# Altium PCB PCB_mounting.PcbDoc (part 1 of 4)
Units mm, origin at the board's own origin, x right, y up, seen from the top; angles counter-clockwise.
Board outline 75 x 100 mm, 4 copper layers (Top Layer, Int1 (GND), Int2 (PWR), Bottom Layer), stack 1.586 mm thick; 145 components, 97 nets, 660 pads, 380 vias.
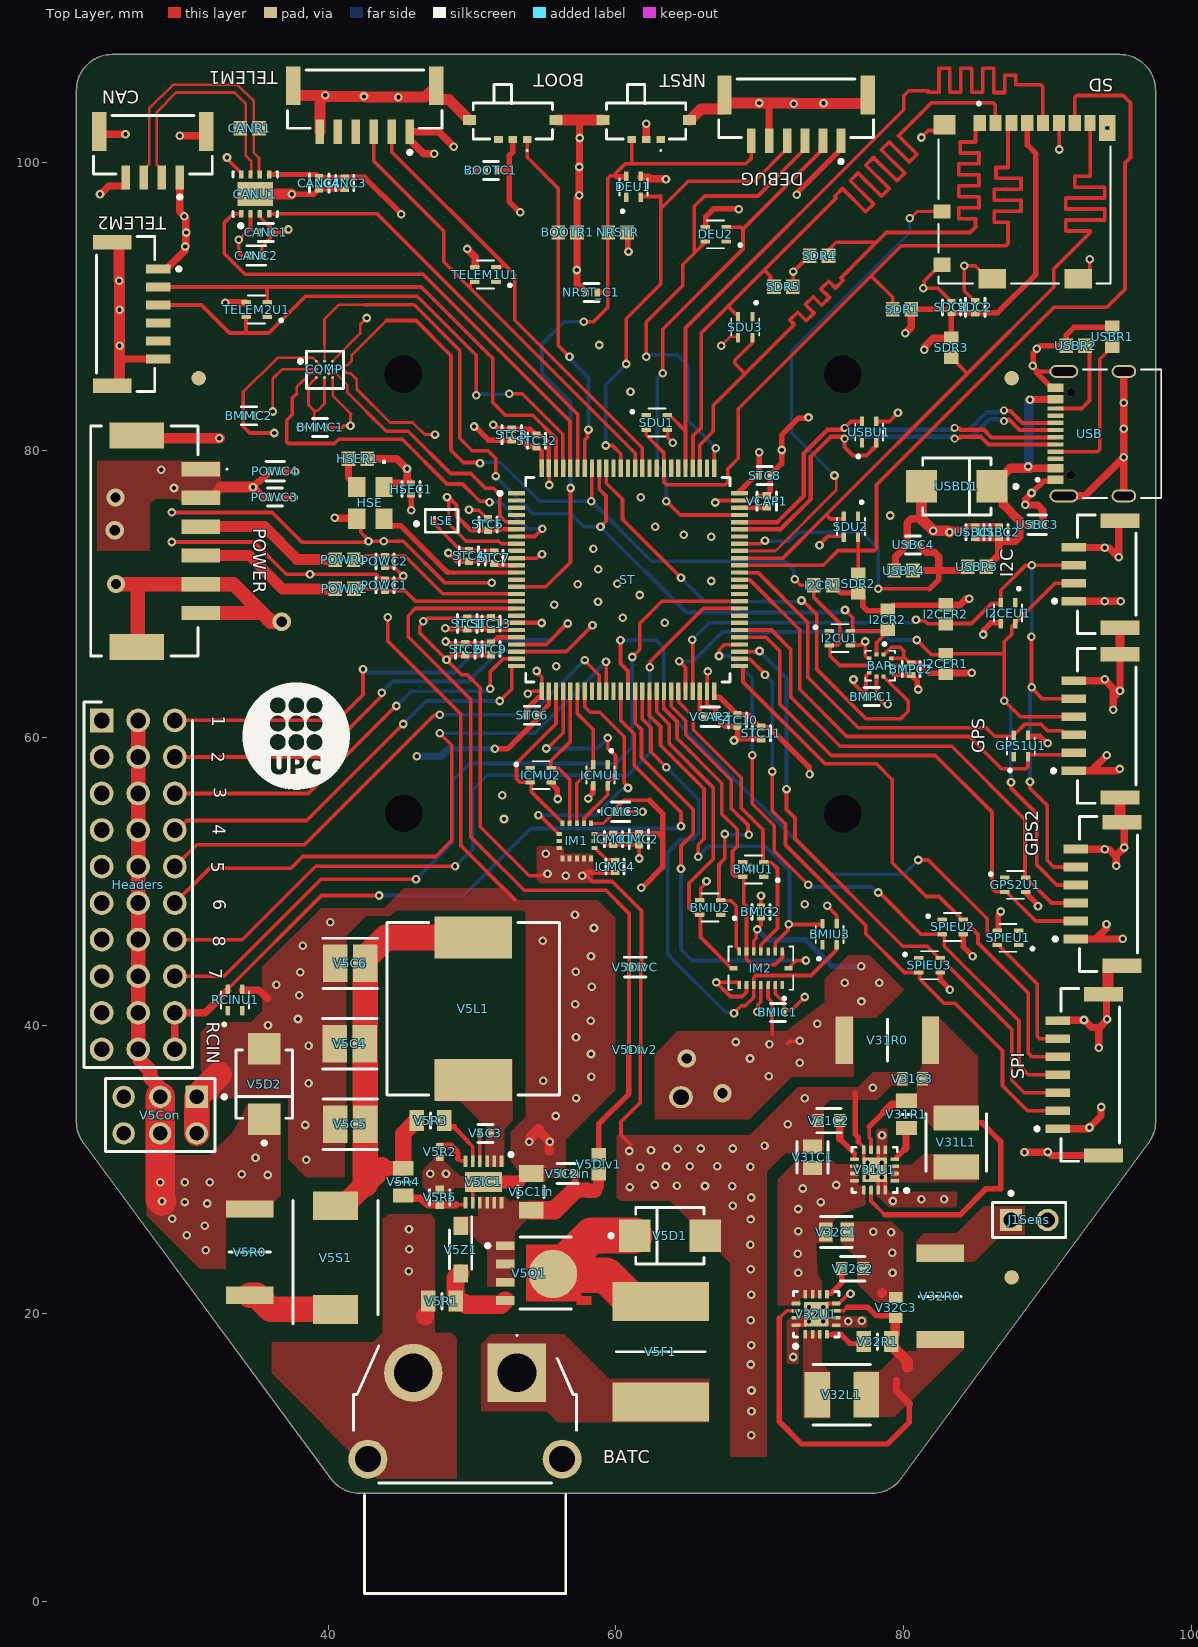
[diagram p0: Top Layer view]
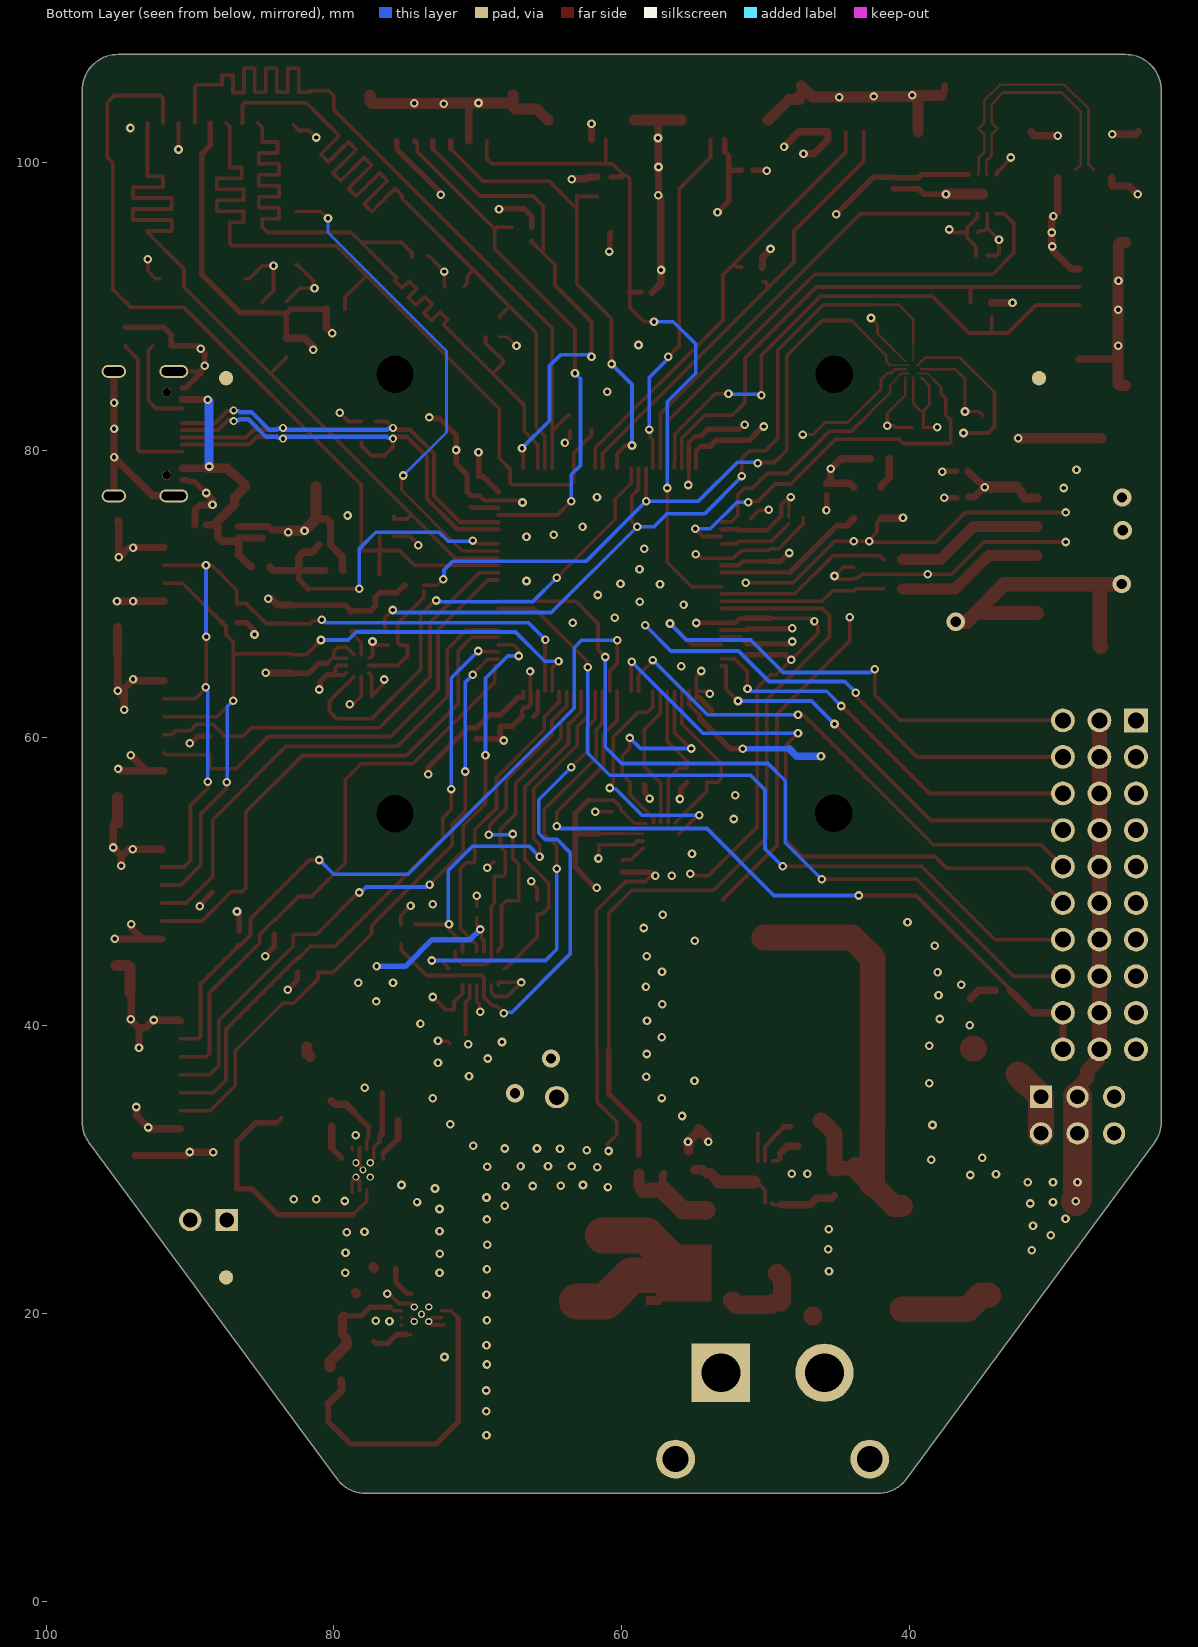
[diagram p1: Bottom Layer view, seen from below]
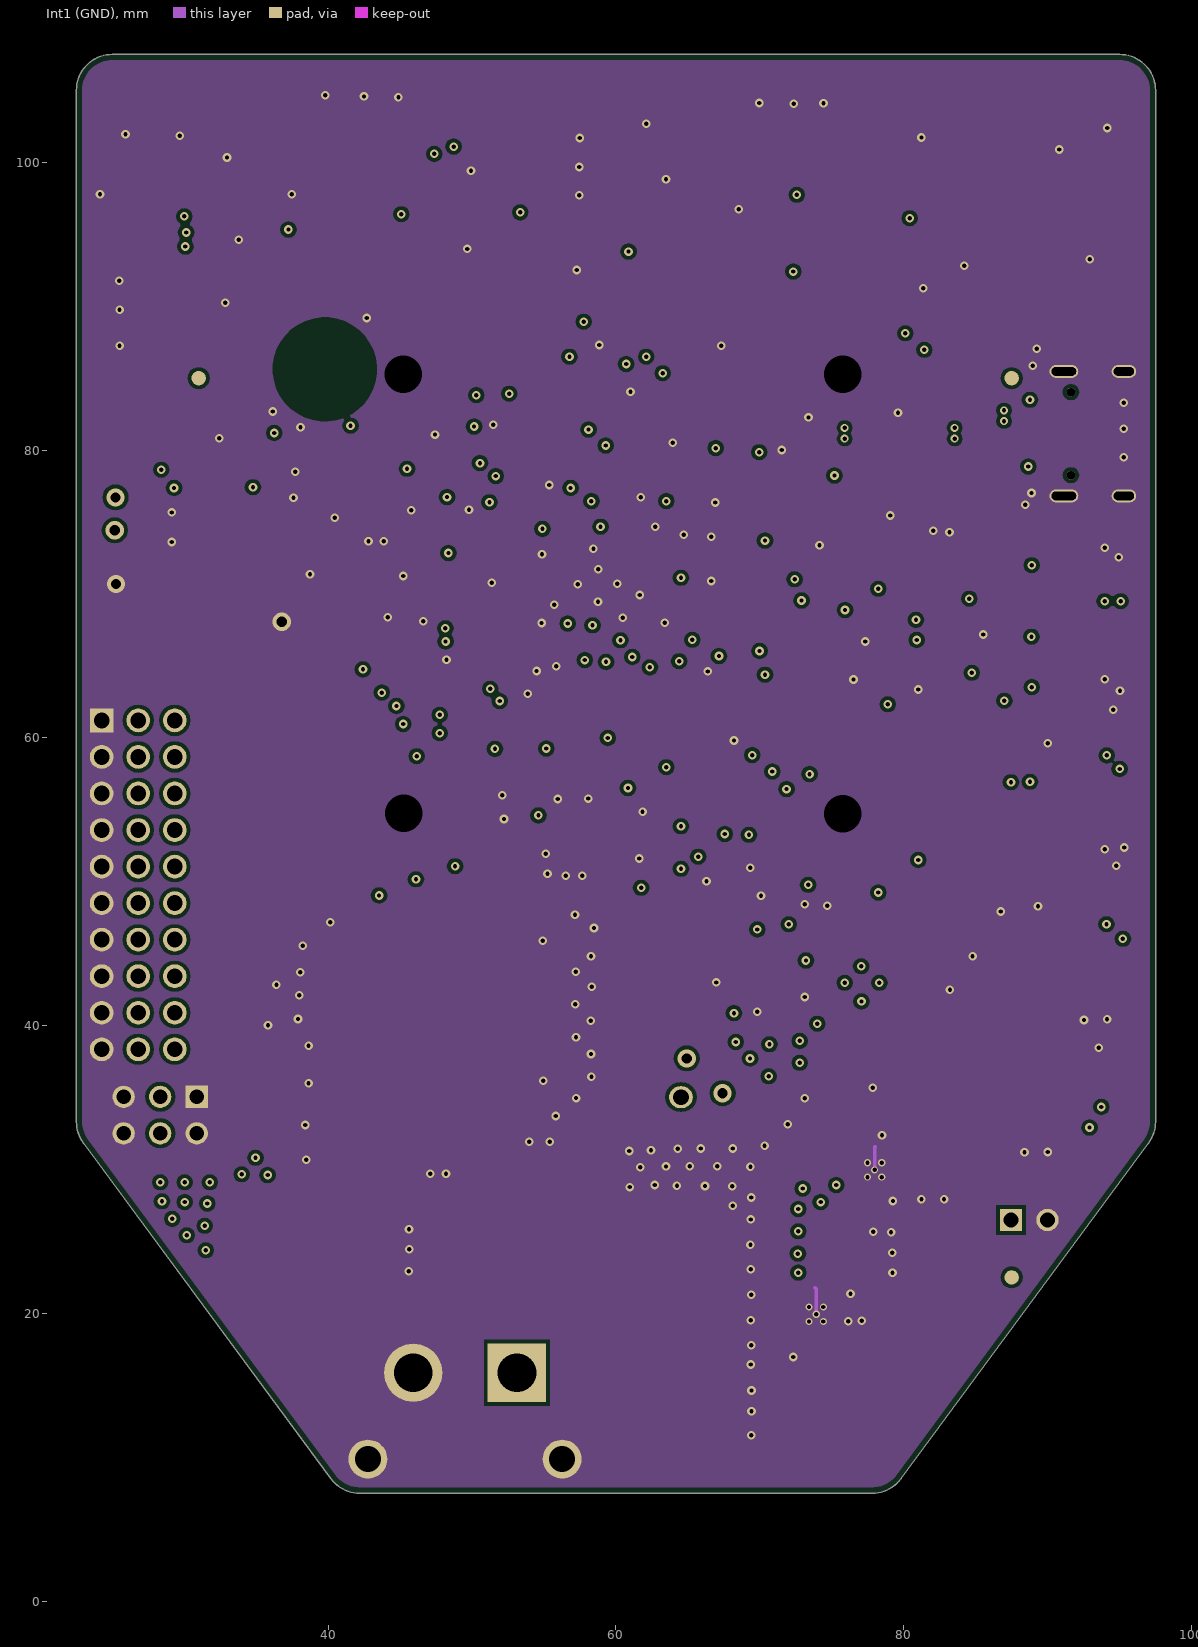
[diagram p2: Int1 (GND)]
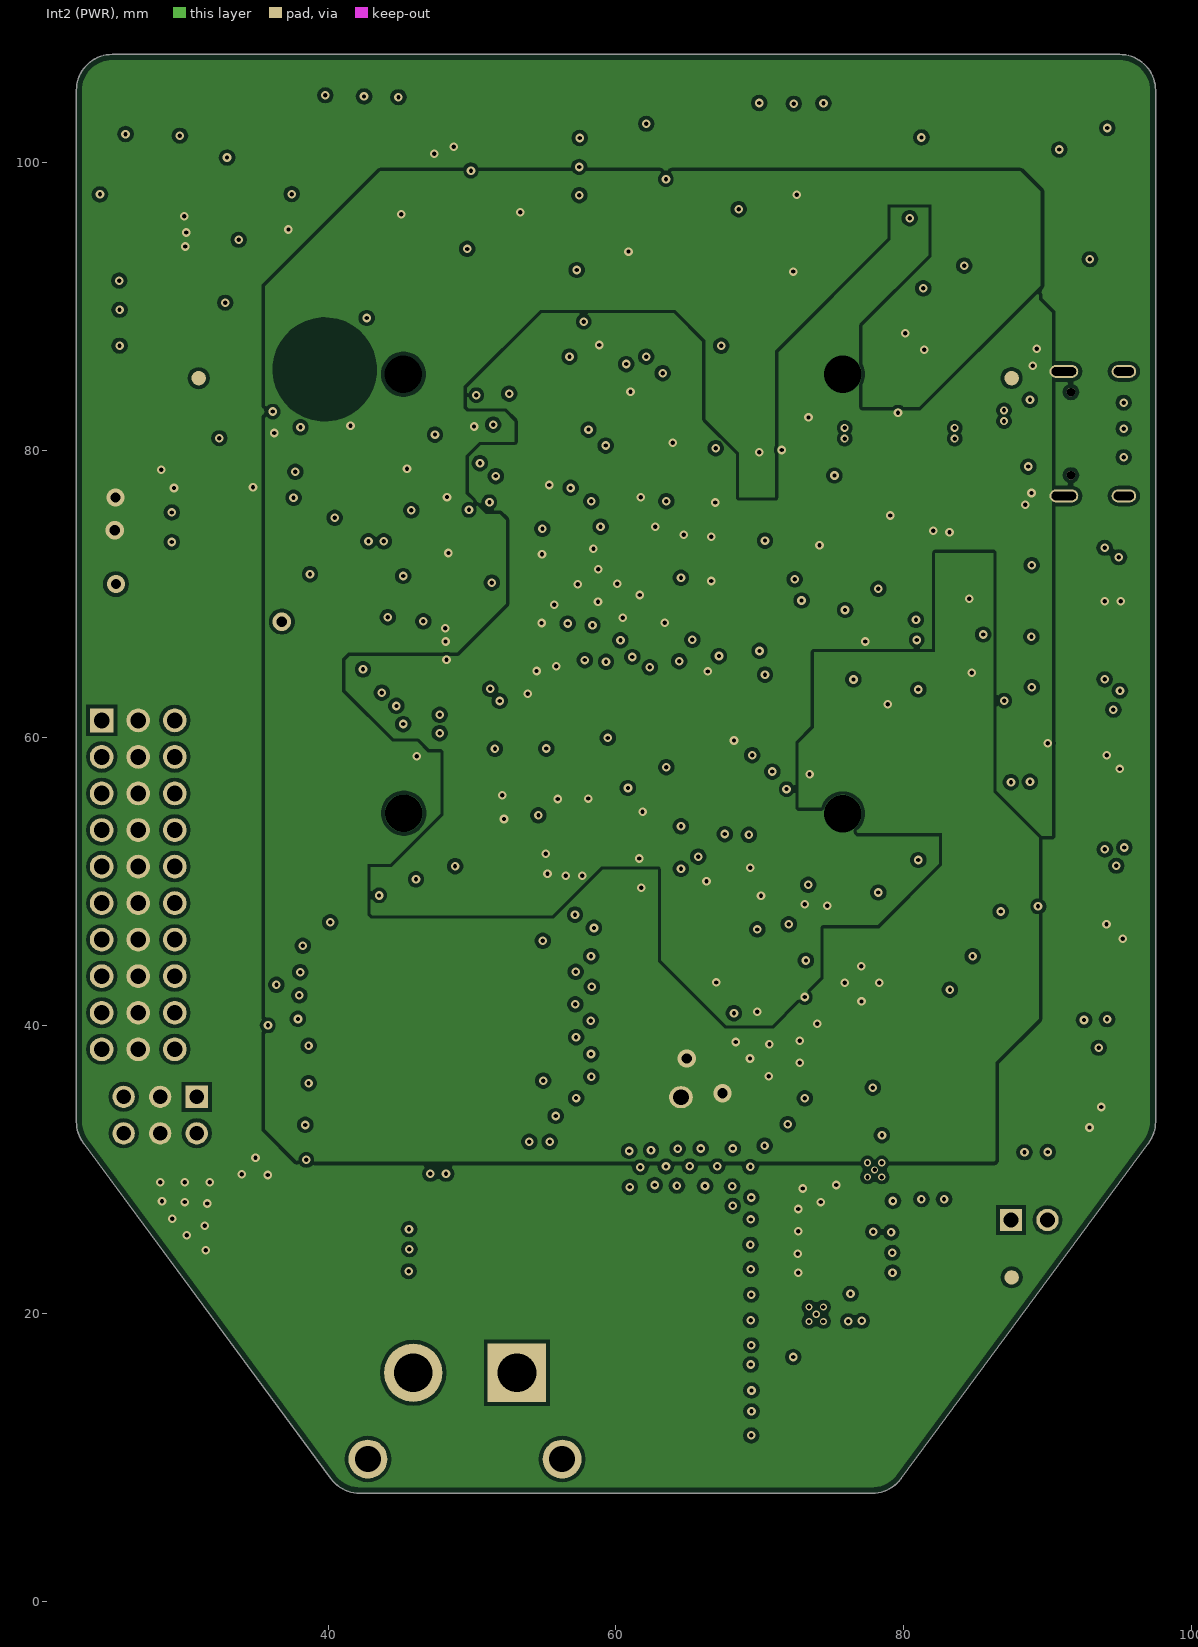
[diagram p3: Int2 (PWR)]
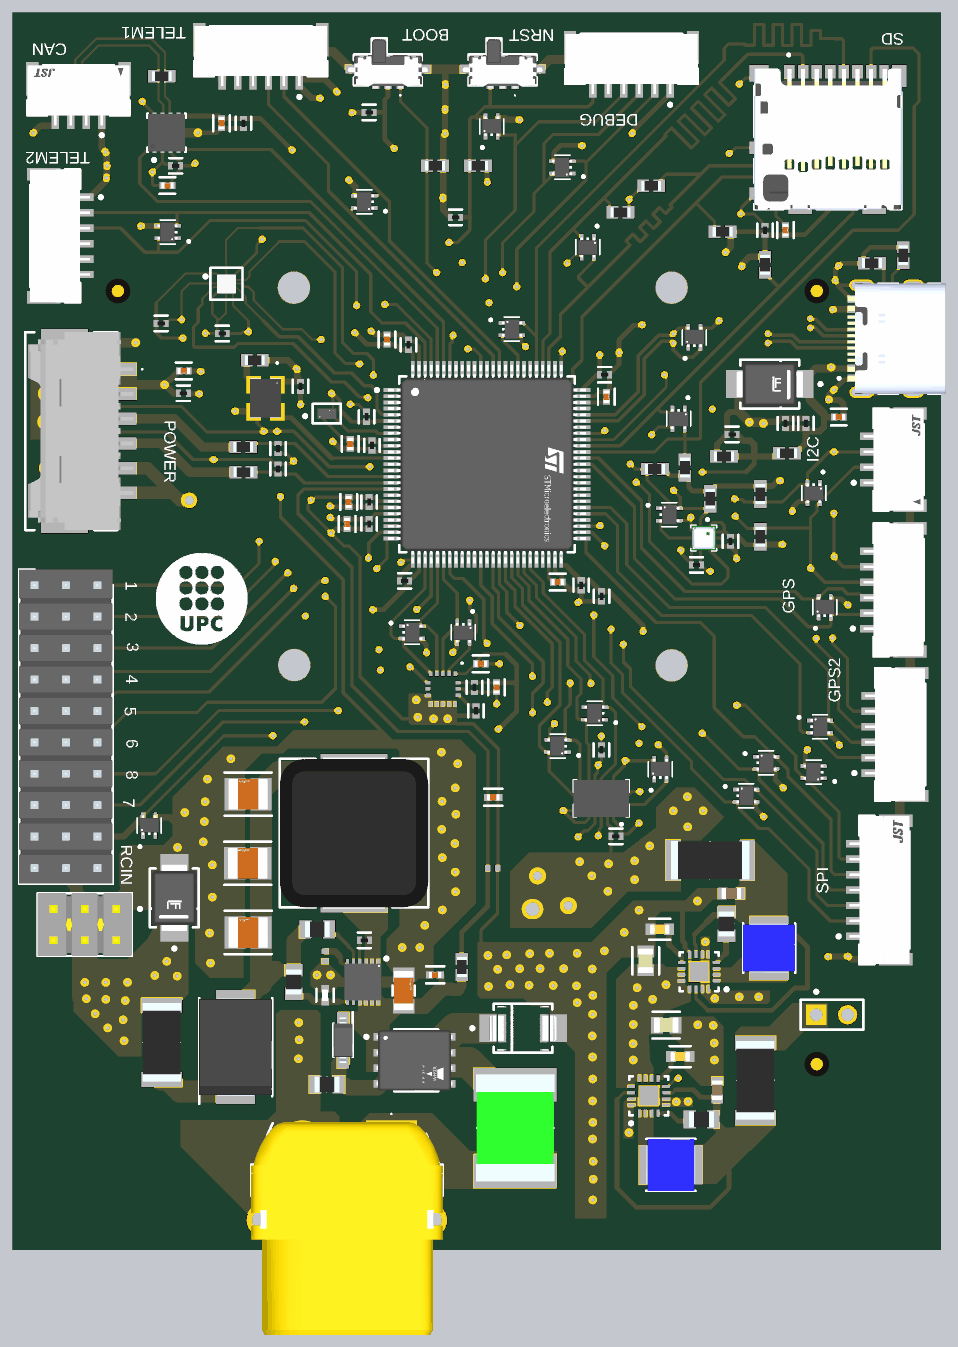
[diagram p6: 3D render of the assembled board from above, using the file's embedded part models]

## Layer stack, top to bottom
Top Solder: solder mask 0.0254, SM-001, Dk 4
Top Layer: signal copper 0.035
Dielectric 2: prepreg 0.2104, 7628, Dk 4.4
Int1 (GND): signal copper 0.0152
Dielectric 3: core 1.065, FR4, Dk 4.6
Int2 (PWR): signal copper 0.0152
Dielectric 4: prepreg 0.2104, 7628, Dk 4.4
Bottom Layer: signal copper 0.035
Bottom Solder: solder mask 0.0254, SM-001, Dk 4

## Board outline
22.988,31.838 cw(c25,33.322) 22.5,33.322 22.5,105 cw(c25,105) 25,107.5 95,107.5 cw(c95,105) 97.5,105 97.5,33.322 cw(c95,33.322) 97.012,31.838 79.812,8.516 cw(c77.8,10) 77.8,7.5 42.2,7.5 cw(c42.2,10) 40.188,8.516

## Design rules (kind name [scope] priority, off if disabled: settings)
BoardOutlineClearance [All] p1: gap=0.4 ignorepadtopadclearanceinfootprint=FALSE
Clearance [All] p1: gap=0.254 ignorepadtopadclearanceinfootprint=TRUE except(0.102: Arc-Arc Arc-Track Arc-SMDPad Track-Track Track-SMDPad; 0.15: SMDPad-SMDPad SMDPad-THPad SMDPad-Via SMDPad-Hole THPad-THPad THPad-Via THPad-Hole; 0.152: Arc-Via Track-Via; 0.2: Via-Via; 0.28: Arc-THPad Track-THPad)
ComponentClearance [All] p1: gap=0.4 collisioncheckmode=3 verticalgap=0.254 showdistances=FALSE
DiffPairsRouting DiffPairsRouting_1 [InDifferentialPair('CAN')] p1: maxlimit=0.483 minlimit=0.203 mostfreqgap=0.483 toplayer_mingap=0.356 toplayer_maxgap=0.356 toplayer_prefgap=0.356 toplayer_minwidth=0.182 toplayer_maxwidth=0.182 toplayer_prefwidth=0.182 bottomlayer_mingap=0.356 bottomlayer_maxgap=0.356 bottomlayer_prefgap=0.356 bottomlayer_minwidth=0.182 bottomlayer_maxwidth=0.182 bottomlayer_prefwidth=0.182 impedanceprofiledriven=TRUE impedanceprofileid={2F0167D7-8F8B-47BC-B081-F93A2940DF9A} impedanceprofilevalue=120.000000 maxuncoupledlength=12.7
DiffPairsRouting [InDifferentialPair('USB_OTG_FS')] p2: maxlimit=0.254 minlimit=0.203 mostfreqgap=0.254 toplayer_maxgap=0.203 toplayer_prefgap=0.203 toplayer_minwidth=0.286 toplayer_maxwidth=0.286 toplayer_prefwidth=0.286 bottomlayer_maxgap=0.203 bottomlayer_prefgap=0.203 bottomlayer_minwidth=0.286 bottomlayer_maxwidth=0.286 bottomlayer_prefwidth=0.286 impedanceprofiledriven=TRUE impedanceprofileid={D853BFCF-9175-4109-AF81-765B84E8F480} impedanceprofilevalue=90.000000 maxuncoupledlength=12.7
HoleSize [All] p1: absolutevalues=TRUE maxlimit=6.3 minlimit=0.2 maxpercent=80.000 minpercent=20.000
MatchedLengths "Schematic Matched Net Lengths" [InNetClass('SDMMC')] p1: tolerance=1.5 checknetsindiffpair=FALSE checkdiffpairvsdiffpair=TRUE checkxsignals=TRUE checkothers=TRUE
MinimumSolderMaskSliver [All] p1: minsoldermaskwidth=0.1
PolygonConnect [All] p1: connectstyle=Direct reliefconductorwidth=0.254 reliefentries=4 polygonreliefangle="90 Angle" airgapwidth=0.254
RoutingVias [All] p1: holewidth=0.3 width=0.6 viastyle="Through Hole" minholewidth=0.2 minwidth=0.45 maxholewidth=0.711 maxwidth=1.27
SilkToSolderMaskClearance [IsPad] p1: minsilkscreentomaskgap=0.15 clearancetoexposedcopper=TRUE
SolderMaskExpansion [All] p1: expansion=0.05 istentingtop=FALSE
SupplyNets "Schematic Supply Nets_4" [InNet('+5')] p1: voltage=0.000
SupplyNets "Schematic Supply Nets_3" [InNet('GND')] p2: voltage=0.000
SupplyNets "Schematic Supply Nets_2" [InNet('+3V3 Sens')] p3: voltage=0.000
SupplyNets "Schematic Supply Nets_1" [InNet('BAT (6-36)V')] p4: voltage=0.000
SupplyNets "Schematic Supply Nets" [InNet('+3V3 Core')] p5: voltage=0.000
UnRoutedNet [All] p1: checkbadconnections=TRUE
Width Width_1 [InNetClass('BMM')] p1: maxlimit=0.762 minlimit=0.102 preferedwidth=0.2
Width [All] p2: maxlimit=2.5 minlimit=0.102 preferedwidth=0.254
24 further rules are at their usual default settings.

## Classes and differential pairs
net class DIFF120: CAN_N CAN_P
net class DIFF90: USB_OTG_FS_N USB_OTG_FS_P
net class SDMMC: SDMMC_CK SDMMC_CMD SDMMC_D0 SDMMC_D1 SDMMC_D2 SDMMC_D3
differential pair USB_OTG_FS: +USB_OTG_FS_P -USB_OTG_FS_N
differential pair CAN: +CAN_P -CAN_N

## Components (designator, comment, footprint, x,y, rotation, side; value= is the part's Value field where it differs from the comment)
BAR "BMP388" PQFN50P200X200X80-10N 78.359,65.024 r270 top
BATC "XT60PW-F" XT60PWF 53.111,15.875 r180 top
BMIC1 "100nF 1mOhm" FP-GRM15-MFG#1 71.26,40.919 r0 top value=0.10μF
BMIC2 "100nF 1mOhm" FP-GRM15-MFG#1 70.079,47.904 r90 top value=0.10μF
BMIU1 "TPD2E2U06DRLR" SOTFL50P160X60-5N#1 69.545,50.851 r180 top
BMIU2 "TPD2E2U06DRLR" SOTFL50P160X60-5N#1 66.548,48.209 r180 top
BMIU3 "TPD2E2U06DRLR" SOTFL50P160X60-5N#1 74.854,46.344 r90 top
BMMC1 "100nF 1mOhm" FP-GRM15-MFG#1 39.433,81.572 r180 top value=0.10μF
BMMC2 "100nF 1mOhm" FP-GRM15-MFG#1 34.493,82.385 r0 top value=0.10μF
BMPC1 "100nF 1mOhm" FP-GRM15-MFG#1 77.775,62.865 r180 top value=0.10μF
BMPC2 "100nF 1mOhm" FP-GRM15-MFG#1 80.518,64.77 r270 top value=0.10μF
BOOT "SSAJ120100" SSAJ120100 52.832,102.87 r180 top (schematic designator BOOT_SW)
BOOTC1 "100nF 1mOhm" FP-GRM15-MFG#1 51.308,99.441 r180 top value=0.10μF
BOOTR1 "10kOhm" RESC1608X55N 56.642,95.123 r0 top
CAN "SM04B-GHS-TB(LF)(SN)" FP-SM04B-GHS-TB_LF_SN-MFG 27.813,101.219 r180 top
CANC1 "100nF 1mOhm" FP-GRM15-MFG#1 35.662,95.123 r180 top value=0.10μF
CANC2 "2.2uF" FP-CL50-IPC_C 35.001,93.523 r180 top
CANC3 "100nF 1mOhm" FP-GRM15-MFG#1 41.148,98.552 r270 top value=0.10μF
CANC4 "2.2uF" FP-CL50-IPC_C 39.37,98.554 r270 top
CANR1 "120Ohm" RESC1608X55N 34.544,102.362 r180 top
CANU1 "TJA1051TK/3/1J" FP-SOT782-1-MFG 34.925,97.79 r90 top
COMP "BMM150" FP-BMM150-MFG 39.776,85.573 r0 top
DEBUG "SM06B-GHS-TB(LF)(SN)" FP-SM06B-GHS-TB_LF_SN-MFG 72.517,103.759 r180 top
DEU1 "TPD2E2U06DRLR" SOTFL50P160X60-5N#1 61.214,98.298 r90 top
DEU2 "TPD2E2U06DRLR" SOTFL50P160X60-5N#1 66.929,94.996 r180 top
GPS "SM06B-GHS-TB(LF)(SN)" FP-SM06B-GHS-TB_LF_SN-MFG 94.107,60.833 r90 top
GPS1U1 "TPD2E2U06DRLR" SOTFL50P160X60-5N#1 88.138,59.436 r90 top
GPS2 "SM06B-GHS-TB(LF)(SN)" FP-SM06B-GHS-TB_LF_SN-MFG 94.234,49.149 r90 top
GPS2U1 "TPD2E2U06DRLR" SOTFL50P160X60-5N#1 87.757,49.784 r0 top
Headers "HTSW-110-07-L-T" HDRV30W64P254_3X10_2540X756X838P 24.257,61.214 r270 top
HSE "ASEMB-24.000MHZ-LC-T" SON4_SIT1602-2_SIT 42.926,76.327 r270 top
HSEC1 "100nF 1mOhm" FP-GRM15-MFG#1 45.758,77.292 r270 top value=0.10μF
HSER1 "2.2kOhm" RESC1608X55N 42.062,79.4 r180 top
I2C "SM04B-GHS-TB(LF)(SN)" FP-SM04B-GHS-TB_LF_SN-MFG 94.107,71.374 r90 top (schematic designator I2C_EXT)
I2CER1 "2.2kOhm" RESC1608X55N 82.931,65.136 r90 top
I2CER2 "2.2kOhm" RESC1608X55N 82.931,68.58 r270 top
I2CEU1 "TPD2E2U06DRLR" SOTFL50P160X60-5N#1 87.249,68.667 r270 top
I2CR1 "2.2kOhm" RESC1608X55N 74.407,70.612 r180 top
I2CR2 "2.2kOhm" RESC1608X55N 78.88,68.199 r270 top
I2CU1 "TPD2E2U06DRLR" SOTFL50P160X60-5N#1 75.565,66.929 r0 top
ICMC1 "100nF 1mOhm" FP-GRM15-MFG#1 59.817,52.959 r270 top value=0.10μF
ICMC2 "2.2uF" FP-CL50-IPC_C 61.595,52.959 r270 top
ICMC3 "10nF" FP-CL165-IPC_C 60.325,54.864 r0 top
ICMC4 "100nF 1mOhm" FP-GRM15-MFG#1 59.944,51.054 r270 top value=0.10μF
ICMU1 "TPD2E2U06DRLR" SOTFL50P160X60-5N#1 58.928,57.404 r270 top
ICMU2 "TPD2E2U06DRLR" SOTFL50P160X60-5N#1 54.777,57.404 r0 top
IM1 "ICM-20602" INSE-I62-16 57.277,52.832 r270 top
IM2 "BMI088" PQFN50P450X300X100-16N 70.071,43.989 r180 top
J1Sens "68000-102HLF" AMPH-68000-102HLF_V 88.722,26.492 r0 top
LSE "SIT1552AI-JE-DCC-32.768D" FP-SiT1552-J-MFG 47.887,75.081 r0 top
NRST "SSAJ120100" SSAJ120100 62.103,102.87 r180 top (schematic designator NRST_SW)
NRST_C1 "100nF 1mOhm" FP-GRM15-MFG#1 58.293,90.957 r180 top value=0.10μF
NRSTR "10kOhm" RESC1608X55N 60.122,95.123 r0 top
POWC1 "100nF 1mOhm" FP-GRM15-MFG#1 43.942,70.612 r90 top value=0.10μF
POWC2 "100nF 1mOhm" FP-GRM15-MFG#1 43.942,72.263 r270 top value=0.10μF
POWC3 "100nF 1mOhm" FP-GRM15-MFG#1 36.297,76.733 r0 top value=0.10μF
POWC4 "1uF" FP-CL542-IPC_C 36.322,78.537 r0 top
POWER "502494-0670" 5024940670 27.32,73.676 r270 top
POWR1 "2.2kOhm" RESC1608X55N 41.133,72.39 r0 top
POWR2 "2.2kOhm" RESC1608X55N 41.148,70.358 r0 top
RCINU1 "TPD2E2U06DRLR" SOTFL50P160X60-5N#1 33.528,41.783 r90 top
SD "104031-0811" MOLEX_104031-0811 88.392,97.282 r180 top
SDC1 "100nF 1mOhm" FP-GRM15-MFG#1 83.312,89.916 r90 top value=0.10μF
SDC2 "1uF" FP-CL542-IPC_C 84.963,89.916 r90 top
SDR1 "10kOhm" RESC1608X55N 79.883,89.789 r180 top
SDR2 "10kOhm" RESC1608X55N 76.835,70.724 r90 top
SDR3 "10kOhm" RESC1608X55N 83.312,87.122 r270 top
SDR4 "10kOhm" RESC1608X55N 74.117,93.497 r0 top
SDR5 "10kOhm" RESC1608X55N 71.628,91.351 r180 top
SDU1 "TPD2E2U06DRLR" SOTFL50P160X60-5N#2 62.84,81.915 r0 top
SDU2 "TPD2E2U06DRLR" SOTFL50P160X60-5N#1 76.327,74.676 r270 top
SDU3 "TPD2E2U06DRLR" SOTFL50P160X60-5N#1 68.986,88.544 r270 top
SPI "SM07B-GHS-TB(LF)(SN)" FP-SM07B-GHS-TB_LF_SN-MFG 92.964,36.576 r90 top (schematic designator SPI_EXT)
SPIEU1 "TPD2E2U06DRLR" SOTFL50P160X60-5N#1 87.249,46.101 r180 top
SPIEU2 "TPD2E2U06DRLR" SOTFL50P160X60-5N#1 83.399,46.855 r0 top
SPIEU3 "TPD2E2U06DRLR" SOTFL50P160X60-5N#1 81.788,44.196 r0 top
ST "STM32H743VIT6" FP-LQFP100-1L-MFG 60.833,70.993 r0 top locked
STC1 "1uF" FP-CL542-IPC_C 49.657,67.945 r90 top
STC2 "1uF" FP-CL542-IPC_C 49.53,66.167 r270 top
STC3 "4.7uF" FP-CL282-IPC_C 52.756,81.077 r90 top
STC4 "4.7uF" FP-CL282-IPC_C 49.784,72.644 r90 top
STC5 "100nF 1mOhm" FP-GRM15-MFG#2 51.105,74.828 r90 top value=0.10μF
STC6 "100nF 1mOhm" FP-GRM15-MFG#1 54.178,61.57 r180 top value=0.10μF
STC7 "100nF 1mOhm" FP-GRM15-MFG#2 51.537,72.517 r90 top value=0.10μF
STC8 "100nF 1mOhm" FP-GRM15-MFG#1 70.339,78.232 r0 top value=0.10μF
STC9 "100nF 1mOhm" FP-GRM15-MFG#2 51.308,66.167 r270 top value=0.10μF
STC10 "100nF 1mOhm" FP-GRM15-MFG#2 68.453,61.214 r270 top value=0.10μF
STC11 "100nF 1mOhm" FP-GRM15-MFG#2 70.104,60.325 r270 top value=0.10μF
STC12 "100nF 1mOhm" FP-GRM15-MFG#2 54.483,80.645 r90 top value=0.10μF
STC13 "100nF 1mOhm" FP-GRM15-MFG#2 51.308,67.945 r90 top value=0.10μF
TELEM1 "SM06B-GHS-TB(LF)(SN)" FP-SM06B-GHS-TB_LF_SN-MFG 42.545,104.394 r180 top
TELEM1U1 "TPD2E2U06DRLR" SOTFL50P160X60-5N#3 50.927,92.202 r180 top
TELEM2 "SM06B-GHS-TB(LF)(SN)" FP-SM06B-GHS-TB_LF_SN-MFG 25.919,89.458 r270 top
TELEM2U1 "TPD2E2U06DRLR" SOTFL50P160X60-5N#1 35.027,89.764 r180 top
USB "TYPE-C-31-M-12" HRO_TYPE-C-31-M-12 95.301,81.141 r90 top
USBC1 "100nF 1mOhm" FP-GRM15-MFG#1 84.963,74.295 r90 top value=0.10μF
USBC2 "100nF 1mOhm" FP-GRM15-MFG#1 86.614,74.295 r90 top value=0.10μF
USBC3 "2.2uF" FP-CL50-IPC_C 89.279,74.803 r0 top
USBC4 "100nF 1mOhm" FP-GRM15-MFG#1 80.645,73.406 r180 top value=0.10μF
USBD1 "SMBJ5.0A" FP-SMBJ-MFG 83.693,77.47 r180 top
USBR1 "5.1kOhm" RESC1608X55N 94.488,87.884 r90 top
USBR2 "5.1kOhm" RESC1608X55N 91.948,87.249 r180 top
USBR3 "5.1kOhm" RESC1608X55N 85.09,71.882 r180 top
USBR4 "10kOhm" RESC1608X55N 79.995,71.628 r180 top
USBU1 "TPD2E2U06DRLR" SOTFL50P160X60-5N#1 77.597,81.255 r90 top
V5C1in "4.7uF 3mOhm" FP-GRM31C-0_2-e0_3_0_8-IPC_C 54.102,28.448 r90 top
V5C2in "100nF 39mOhm??" FP-GRM155-0_05-IPC_B 56.642,29.718 r180 top
V5C3 "100nF 1mOhm" FP-GRM15-MFG#1 50.927,32.512 r0 top value=0.10μF
V5C4 "47uF 3mOhm" FP-GRM32E-0_3-0_2-IPC_C 41.494,38.735 r180 top
V5C5 "47uF 3mOhm" FP-GRM32E-0_3-0_2-IPC_C 41.529,33.147 r180 top
V5C6 "47uF 3mOhm" FP-GRM32E-0_3-0_2-IPC_C 41.529,44.323 r180 top
V5Con "TSW-103-08-L-D" SMTC-TSW-103-08-L-D_V 28.321,33.782 r180 top
V5D1 "SMBJ36A" FP-SMBJ-MFG 63.754,25.4 r0 top
V5D2 "SMBJ5.0A" FP-SMBJ-MFG 35.56,35.941 r90 top
V5Div1 "360kOhm 100mW" RESC1608X55N 58.801,30.353 r90 top
V5Div2 "30.9kOhm 63mW" RESC1005X40X25LL05T05#1 61.29,38.329 r0 top
V5DivC "100nF 39mOhm??" FP-GRM155-0_05-IPC_B 61.341,44.069 r0 top
V5F1 "3425L300_36MR" FUSC8664X140N 63.119,17.338 r90 top
V5IC1 "LMR51450FNDRRR" SON50P300X300X80-13N-D 50.796,29.136 r270 top
V5L1 "10uH 16mOhm" SUMI-CDRH127_V 50.089,41.173 r180 top
V5Q1 "SI7489DP-T1-E3" FP-S17-0173-SINGLE-MFG 54.981,22.802 r0 top
V5R0 "AC2512JK-070RL" RESC6431X65N 34.544,24.257 r90 top
V5R1 "100kOhm" RESC2013X65N 47.904,20.853 r180 top
V5R2 "30.9kOhm" RESC1005X40X25LL05T05#2 47.752,31.223 r270 top
V5R3 "100kOhm" RESC2013X65N 47.117,33.401 r180 top
V5R4 "100kOhm" RESC2013X65N 45.212,29.144 r270 top
V5R5 "16.9kOhm" FP-CRCW0402-e3-MFG 47.752,28.067 r90 top
V5S1 "SS34C" DIOM7959X262N 40.513,23.876 r90 top
V5Z1 "BZT52C15-E3-08" SOD3716X135N 49.2,24.435 r270 top
V31C1 "10uF 3mOhm" FP-C0805C-DG-MFG 73.66,30.849 r90 top value=10uF
V31C2 "390pF 1mOhm" FP-CC0603-DA-MFG 74.803,33.401 r180 top value="390 pF"
V31C3 "22uF 1mOhm" CAPC1608X90N 80.594,36.297 r180 top
V31L1 "2.2uH" INDPM4042X200N 83.642,31.877 r90 top
V31R0 "AC2512JK-070RL" RESC6431X65N 78.867,38.989 r180 top
V31R1 "100kOhm" RESC2013X65N 80.188,33.833 r90 top
V31U1 "TPS62142RGTT" RGT0016C_V 77.978,29.972 r180 top
V32C1 "10uF 3mOhm" FP-C0805C-DG-MFG 75.323,25.654 r0 top value=10uF
V32C2 "390pF 1mOhm" FP-CC0603-DA-MFG 76.454,23.114 r0 top value="390 pF"
V32C3 "22uF 1mOhm" CAPC1608X90N 79.451,20.396 r90 top
V32L1 "2.2uH" INDPM4042X200N 75.692,14.351 r0 top
V32R0 "AC2512JK-070RL" RESC6431X65N 82.525,21.184 r90 top
V32R1 "100kOhm" RESC2013X65N 78.171,18.034 r0 top
V32U1 "TPS62142RGTT" RGT0016C_V 73.914,19.939 r90 top
VCAP1 "2.2uF" FP-CL50-IPC_C 70.485,76.454 r90 top
VCAP2 "2.2uF" FP-CL50-IPC_C 66.548,61.468 r0 top

## Footprints (in the part's own frame and the unit in brackets; to place one, negate y for a bottom-side part, rotate by r counter-clockwise, add the part's x,y. Pads: shape width x height; smd on the part's side, far side on the other; paste and mask are expansions set on the pad)
5024940670 [mm]
  rect 1x2.7 smd: 1(-5,3.825) 2(-3,3.825) 3(-1,3.825) 4(1,3.825) 5(3,3.825) 6(5,3.825)
  rect 1.8x3.8 smd: MP1(-7.35,-0.625) MP2(7.35,-0.625)
  silkscreen extent -8,-3.83 8,5.7, body extent -8,-3.58 8,4.92, height 6.9
AMPH-68000-102HLF_V [mm] "THD, 2-Leads, Body 5.08x2.41mm, Pitch 2.54mm"
  rect 1.55x1.55 hole 1.02: 1(-1.27,0)
  round 1.55 hole 1.02: 2(1.27,0)
  silkscreen extent -2.54,-1.2 2.54,1.98, body extent -2.54,-1.2 2.54,1.2, height 8.38
CAPC1608X90N [mm]
  rect 0.75x0.94 smd: 1(-0.7,0) 2(0.7,0)
  body extent -0.8,-0.45 0.8,0.45, height 0.8
DIOM7959X262N [mm]
  rect 2x3.15 smd: 1(-3.6,0) 2(3.6,0)
  silkscreen extent -4.6,-2.95 3.97,2.95, body extent -3.97,-2.95 3.97,2.95, height 2.62
FP-BMM150-MFG [mm]
  round 0.2 smd paste+0 mask+0: A1(-0.601,0.601) A3(-0.035,0.601) A5(0.531,0.601) B2(-0.318,0.318) B4(0.248,0.318) C1(-0.601,0.035) C5(0.531,0.035) D2(-0.318,-0.248) D4(0.248,-0.248) E1(-0.601,-0.531) E3(-0.035,-0.531) E5(0.531,-0.531)
  silkscreen extent -1.82,-1.3 1.3,1.3, body extent -1.3,-1.3 1.3,1.3, height 0.25
FP-C0805C-DG-MFG [mm]
  rect 0.95x1.35 smd paste+0 mask+0: 1(-0.75,0) 2(0.75,0)
  silkscreen extent -1.11,-1.08 1.1,1.07, body extent -1.4,-0.85 1.4,0.85, height 0.25
FP-CC0603-DA-MFG [mm]
  rect 0.8x0.9 smd paste+0 mask+0: 1(-0.75,0) 2(0.75,0)
  silkscreen extent -0.85,-0.85 0.85,0.85, body extent -1.35,-0.75 1.35,0.75, height 0.25
FP-CL50-IPC_C [mm]
  rect 0.515x0.572 smd paste+0 mask+0: 1(-0.379,0) 2(0.379,0)
  silkscreen extent -0.64,-0.67 0.64,0.67, body extent -0.74,-0.38 0.74,0.38, height 0.25
FP-CL165-IPC_C [mm]
  rect 0.515x0.572 smd paste+0 mask+0: 1(-0.379,0) 2(0.379,0)
  silkscreen extent -0.64,-0.67 0.64,0.67, body extent -0.74,-0.38 0.74,0.38, height 0.25
FP-CL282-IPC_C [mm]
  rect 0.515x0.572 smd paste+0 mask+0: 1(-0.379,0) 2(0.379,0)
  silkscreen extent -0.64,-0.67 0.64,0.67, body extent -0.74,-0.38 0.74,0.38, height 0.25
FP-CL542-IPC_C [mm]
  rect 0.515x0.572 smd paste+0 mask+0: 1(-0.379,0) 2(0.379,0)
  silkscreen extent -0.64,-0.67 0.64,0.67, body extent -0.74,-0.38 0.74,0.38, height 0.25
FP-CRCW0402-e3-MFG [mm]
  rect 0.6x0.6 smd paste+0 mask+0: 1(-0.525,0) 2(0.525,0)
  silkscreen extent -0.53,-0.7 0.53,0.7, body extent -0.92,-0.4 0.92,0.4, height 0.25
FP-GRM15-MFG#1 [mm]
  rect 0.4x0.572 smd paste+0 mask+0: 1(-0.4,0) 2(0.4,0)
  silkscreen extent -0.53,-0.63 0.53,0.63, body extent -0.7,-0.38 0.7,0.38, height 0.25
FP-GRM15-MFG#2 [mm]
  rect 0.515x0.572 smd paste+0 mask+0: 1(-0.4,0) 2(0.4,0)
  silkscreen extent -0.53,-0.63 0.53,0.63, body extent -0.7,-0.38 0.7,0.38, height 0.25
FP-GRM31C-0_2-e0_3_0_8-IPC_C [mm]
  rect 1.155x1.706 smd paste+0 mask+0: 1(-1.276,0) 2(1.276,0)
  silkscreen extent -0.4,-0.9 0.4,0.9, body extent -1.95,-1 1.95,1, height 0.25
FP-GRM32E-0_3-0_2-IPC_C [mm]
  rect 1.703x2.606 smd paste+0 mask+0: 1(-1.051,0) 2(1.051,0)
  silkscreen extent -1.9,-1.75 1.9,1.75, body extent -2,-1.45 2,1.45, height 0.25
FP-GRM155-0_05-IPC_B [mm]
  rect 0.615x0.572 smd paste+0 mask+0: 1(-0.429,0) 2(0.429,0)
  silkscreen extent -0.74,-0.69 0.74,0.69, body extent -0.89,-0.44 0.89,0.44, height 0.25
FP-LQFP100-1L-MFG [mm]
  rect 1.2x0.3 smd paste+0 mask+0: 1(-7.75,6) 2(-7.75,5.5) 3(-7.75,5) 4(-7.75,4.5) 5(-7.75,4) 6(-7.75,3.5) 7(-7.75,3) 8(-7.75,2.5) 9(-7.75,2) 10(-7.75,1.5) 11(-7.75,1) 12(-7.75,0.5) 13(-7.75,0) 14(-7.75,-0.5) 15(-7.75,-1) 16(-7.75,-1.5) 17(-7.75,-2) 18(-7.75,-2.5) 19(-7.75,-3) 20(-7.75,-3.5) 21(-7.75,-4) 22(-7.75,-4.5) 23(-7.75,-5) 24(-7.75,-5.5) 25(-7.75,-6) 51(7.75,-6) 52(7.75,-5.5) 53(7.75,-5) 54(7.75,-4.5) 55(7.75,-4) 56(7.75,-3.5) 57(7.75,-3) 58(7.75,-2.5) 59(7.75,-2) 60(7.75,-1.5) 61(7.75,-1) 62(7.75,-0.5) 63(7.75,0) 64(7.75,0.5) 65(7.75,1) 66(7.75,1.5) 67(7.75,2) 68(7.75,2.5) 69(7.75,3) 70(7.75,3.5) 71(7.75,4) 72(7.75,4.5) 73(7.75,5) 74(7.75,5.5) 75(7.75,6)
  rect 0.3x1.2 smd paste+0 mask+0: 26(-6,-7.75) 27(-5.5,-7.75) 28(-5,-7.75) 29(-4.5,-7.75) 30(-4,-7.75) 31(-3.5,-7.75) 32(-3,-7.75) 33(-2.5,-7.75) 34(-2,-7.75) 35(-1.5,-7.75) 36(-1,-7.75) 37(-0.5,-7.75) 38(0,-7.75) 39(0.5,-7.75) 40(1,-7.75) 41(1.5,-7.75) 42(2,-7.75) 43(2.5,-7.75) 44(3,-7.75) 45(3.5,-7.75) 46(4,-7.75) 47(4.5,-7.75) 48(5,-7.75) 49(5.5,-7.75) 50(6,-7.75) 76(6,7.75) 77(5.5,7.75) 78(5,7.75) 79(4.5,7.75) 80(4,7.75) 81(3.5,7.75) 82(3,7.75) 83(2.5,7.75) 84(2,7.75) 85(1.5,7.75) 86(1,7.75) 87(0.5,7.75) 88(0,7.75) 89(-0.5,7.75) 90(-1,7.75) 91(-1.5,7.75) 92(-2,7.75) 93(-2.5,7.75) 94(-3,7.75) 95(-3.5,7.75) 96(-4,7.75) 97(-4.5,7.75) 98(-5,7.75) 99(-5.5,7.75) 100(-6,7.75)
  silkscreen extent -9.02,-7.1 7.1,7.1, body extent -8.45,-8.45 8.45,8.45, height 0.25
FP-S17-0173-SINGLE-MFG [mil]
  rect 50x24 smd paste+0 mask+0: 1(-105,75) 2(-105,25) 3(-105,-25) 4(-105,-75)
  round 132.13 smd paste+0 mask+0: 5-6-7-8(25.41,-2.72)
  Top Layer region: -48,77 90,77 90,87 130,87 130,63 102,63 102,37 130,37 130,13 102,13 102,-13 130,-13 130,-37 102,-37 102,-63 130,-63 130,-87 90,-87 90,-77 -48,-77
  silkscreen extent -158,-98 75,98, body extent -134,-107 134,107, height 10
FP-SiT1552-J-MFG [mm]
  round 0.25 smd paste+0 mask-1000: 1(-0.5,-0.205) 2(0.5,-0.205) 3(0.5,0.205) 4(-0.5,0.205)
  silkscreen extent -1.87,-0.79 1.14,0.79, body extent -1.29,-0.94 1.29,0.94, height 0.25
FP-SM04B-GHS-TB_LF_SN-MFG [mm]
  rect 0.6x1.7 smd paste+0 mask+0: 1(-1.875,2.275) 2(-0.625,2.275) 3(0.625,2.275) 4(1.875,2.275)
  rect 1x2.7 smd paste+0 mask+0: 5(-3.725,-0.925) 6(3.725,-0.925)
  silkscreen extent -4.13,-2.02 4.13,3.75, body extent -4.33,-2.37 4.33,3.22, height 0.25
FP-SM06B-GHS-TB_LF_SN-MFG [mm]
  rect 0.6x1.7 smd paste+0 mask+0: 1(-3.125,2.275) 2(-1.875,2.275) 3(-0.625,2.275) 4(0.625,2.275) 5(1.875,2.275) 6(3.125,2.275)
  rect 1x2.7 smd paste+0 mask+0: 7(-4.975,-0.925) 8(4.975,-0.925)
  silkscreen extent -5.38,-2.02 5.38,3.82, body extent -5.58,-2.37 5.58,3.22, height 0.25
FP-SM07B-GHS-TB_LF_SN-MFG [mm]
  rect 0.6x1.7 smd paste+0 mask+0: 1(-3.75,2.275) 2(-2.5,2.275) 3(-1.25,2.275) 4(0,2.275) 5(1.25,2.275) 6(2.5,2.275) 7(3.75,2.275)
  rect 1x2.7 smd paste+0 mask+0: 8(-5.6,-0.925) 9(5.6,-0.925)
  silkscreen extent -6,-2.02 6,3.82, body extent -6.2,-2.37 6.2,3.22, height 0.25
FP-SMBJ-MFG [mm]
  rect 2.16x2.26 smd paste+0 mask+0: 1(-2.45,0) 2(2.45,0)
  silkscreen extent -4.23,-1.97 2.37,1.97, body extent -3.63,-2.07 3.63,2.07, height 0.25
FP-SOT782-1-MFG [mm]
  rect 0.525x0.3 smd paste+0 mask+0: 1(-1.362,0.975) 2(-1.362,0.325) 3(-1.362,-0.325) 4(-1.362,-0.975) 5(1.362,-0.975) 6(1.362,-0.325) 7(1.362,0.325) 8(1.362,0.975)
  rect 1.65x2.45 smd paste-1000 mask+0: 9(0,0)
  silkscreen extent -2.32,-1.55 1.55,1.55, body extent -1.75,-1.65 1.75,1.65, height 0.25
FUSC8664X140N [mm]
  rect 2.73x6.71 smd: 1(-3.49,0) 2(3.49,0)
  silkscreen extent 0,-3.08 0,3.08, body extent -4.33,-3.18 4.33,3.18, height 1.4
HDRV30W64P254_3X10_2540X756X838P [mm]
  rect 1.65x1.65 hole 1.1: 1(0,0)
  round 1.65 hole 1.1: 2(0,2.54) 3(0,5.08) 4(2.54,0) 5(2.54,2.54) 6(2.54,5.08) 7(5.08,0) 8(5.08,2.54) 9(5.08,5.08) 10(7.62,0) 11(7.62,2.54) 12(7.62,5.08) 13(10.16,0) 14(10.16,2.54) 15(10.16,5.08) 16(12.7,0) 17(12.7,2.54) 18(12.7,5.08) 19(15.24,0) 20(15.24,2.54) 21(15.24,5.08) 22(17.78,0) 23(17.78,2.54) 24(17.78,5.08) 25(20.32,0) 26(20.32,2.54) 27(20.32,5.08) 28(22.86,0) 29(22.86,2.54) 30(22.86,5.08)
  silkscreen extent -1.27,-1.24 24.13,6.32, body extent -1.27,-1.24 24.13,6.32, height 8.38
HRO_TYPE-C-31-M-12 [mm]
  rect 0.6x1.14 smd mask+0.025: A1_B12(-3.2,4.75) A4_B9(-2.4,4.75) B1_A12(3.2,4.75) B4_A9(2.4,4.75)
  rect 0.3x1.14 smd mask+0.025: A5(-1.25,4.75) A6(-0.25,4.75) A7(0.25,4.75) A8(1.25,4.75) B5(1.75,4.75) B6(0.75,4.75) B7(-0.75,4.75) B8(-1.75,4.75)
  oval 0.9x2 hole 0.6 slot 1.7 at 90 deg: S1(-4.325,4.17) S2(4.325,4.17)
  oval 0.9x1.7 hole 0.6 slot 1.4 at 90 deg: S3(-4.325,0) S4(4.325,0)
  round 0.6 hole 0.6 unplated mask+0: ""(-2.89,3.68) ""(2.89,3.68)
  silkscreen extent -4.47,-2.6 4.47,6.1, body extent -4.47,-2.6 4.47,5.31, height 3.31
INDPM4042X200N [mm]
  rect 1.75x3.15 smd: 1(-1.7,0) 2(1.7,0)
  silkscreen extent -2,-2.1 2,2.1, body extent -2,-2.1 2,2.1, height 2
INSE-I62-16 [mm] "LGA, 16-Leads, Body 3x3mm, Pitch 0.5mm"
  rect 0.4x0.28 smd: 1(-1.225,1) 2(-1.225,0.5) 3(-1.225,0) 4(-1.225,-0.5) 5(-1.225,-1) 9(1.225,-1) 10(1.225,-0.5) 11(1.225,0) 12(1.225,0.5) 13(1.225,1)
  rect 0.28x0.4 smd: 6(-0.5,-1.225) 7(0,-1.225) 8(0.5,-1.225) 14(0.5,1.225) 15(0,1.225) 16(-0.5,1.225)
  body extent -1.5,-1.5 1.5,1.5, height 0.8
MOLEX_104031-0811 [mm]
  rect 0.85x1.1 smd: 1(3.105,-5.45) 2(2.005,-5.45) 3(0.905,-5.45) 4(-0.195,-5.45) 5(-1.295,-5.45) 6(-2.395,-5.45) 7(-3.495,-5.45)
  rect 0.75x1.1 smd: 8(-4.545,-5.45)
  rect 1.2x1 smd: 9(5.74,0.7) 10(5.74,4.4)
  rect 1.55x1.35 smd: G1(5.565,-5.325)
  rect 1.17x1.8 smd: G2(-5.755,-5.1)
  rect 1.9x1.35 smd: G3(-3.73,5.375) G4(2.24,5.375)
  silkscreen extent -5.97,-6.9 5.97,5.7, body extent -5.97,-5.7 5.97,5.7, height 1.42
PQFN50P200X200X80-10N [mm]
  rrect9% 0.3x0.275 smd: 1(-0.765,0.25) 2(-0.765,-0.25) 6(0.765,-0.25) 7(0.765,0.25)
  rrect9% 0.275x0.3 smd: 3(-0.5,-0.765) 4(0,-0.765) 5(0.5,-0.765) 8(0.5,0.765) 9(0,0.765) 10(-0.5,0.765)
  silkscreen extent -1.6,-1.03 1.03,1.03, body extent -1,-1 1,1, height 0.8
PQFN50P450X300X100-16N [mm]
  rect 0.25x0.55 smd: 1(-1.5,1.165) 2(-1,1.165) 3(-0.5,1.165) 4(0,1.165) 5(0.5,1.165) 6(1,1.165) 7(1.5,1.165) 9(1.5,-1.165) 10(1,-1.165) 11(0.5,-1.165) 12(0,-1.165) 13(-0.5,-1.165) 14(-1,-1.165) 15(-1.5,-1.165)
  rect 0.55x0.3 smd: 8(1.915,0) 16(-1.915,0)
  silkscreen extent -2.25,-1.5 2.25,2.2, body extent -2.25,-1.5 2.25,1.5, height 1
RESC1005X40X25LL05T05#1 [mm] "Chip Resistor, 2-Leads, Body 1.00x0.50mm, IPC High Density"
  rect 0.45x0.5 smd: 1(-0.4,0) 2(0.4,0)
  body extent -0.53,-0.27 0.53,0.28, height 0.4
RESC1005X40X25LL05T05#2 [mm] "Chip Resistor, 2-Leads, Body 1.00x0.50mm, IPC High Density"
  rect 0.45x0.55 smd: 1(-0.4,0) 2(0.4,0)
  body extent -0.53,-0.27 0.53,0.28, height 0.4
RESC1608X55N [mm]
  rect 0.95x1 smd: 1(-0.65,0) 2(0.65,0)
  body extent -0.8,-0.4 0.8,0.4, height 0.55
RESC2013X65N [mm]
  rect 1x1.45 smd: 1(-0.95,0) 2(0.95,0)
  silkscreen extent 0,-0.54 0,0.54, body extent -1,-0.64 1,0.64, height 0.65
RESC6431X65N [mm]
  rect 1.2x3.3 smd: 1(-3,0) 2(3,0)
  silkscreen extent 0,-1.45 0,1.45, body extent -3.17,-1.55 3.17,1.55, height 0.65
RGT0016C_V [mm] "QFN, 16-Leads, Body 3x3mm, Pitch 0.5mm, Thermal Pad 1.65x1.65mm"
  rrect40% 0.6x0.25 smd: 1(-1.4,0.75) 2(-1.4,0.25) 3(-1.4,-0.25) 4(-1.4,-0.75) 9(1.4,-0.75) 10(1.4,-0.25) 11(1.4,0.25) 12(1.4,0.75)
  rrect40% 0.25x0.6 smd: 5(-0.75,-1.4) 6(-0.25,-1.4) 7(0.25,-1.4) 8(0.75,-1.4) 13(0.75,1.4) 14(0.25,1.4) 15(-0.25,1.4) 16(-0.75,1.4)
  rrect6% 1.55x1.55 on Top Paste: 17(0,0)
  rrect6% 1.7x1.7 smd paste-0.85: 17(0,0)
  silkscreen extent -2.35,-1.57 1.57,1.58, body extent -1.5,-1.5 1.5,1.5, height 1
SMTC-TSW-103-08-L-D_V [mm] "CONN, 6-Leads, Body 7.62x5.08mm, Pitch 2.54mm"
  rect 1.55x1.55 hole 1.02: 1(-2.54,-1.27)
  round 1.55 hole 1.02: 2(-2.54,1.27) 3(0,-1.27) 4(0,1.27) 5(2.54,-1.27) 6(2.54,1.27)
  silkscreen extent -4.59,-2.54 3.81,2.54, body extent -3.81,-2.54 3.81,2.54, height 8.38
SOD3716X135N [mm]
  rect 1.25x1 smd: 1(-1.65,0) 2(1.65,0)
  silkscreen extent -2.27,-0.77 1.35,0.77, body extent -1.85,-0.77 1.85,0.77, height 1.35
SON4_SIT1602-2_SIT [mm]
  rect 1.4x1.2 smd paste-0.6 mask+0: 1(-1.1,-0.95) 2(1.1,-0.95) 3(1.1,0.95) 4(-1.1,0.95)
  silkscreen extent -2.93,0.87 -2.78,1.03, body extent -1.6,-1.25 1.6,1.25, height 0.8
SON50P300X300X80-13N-D [mm]
  rect 0.8x0.25 smd mask+0.05: 1(-1.45,1.25) 2(-1.45,0.75) 3(-1.45,0.25) 4(-1.45,-0.25) 5(-1.45,-0.75) 6(-1.45,-1.25) 7(1.45,-1.25) 8(1.45,-0.75) 9(1.45,-0.25) 10(1.45,0.25) 11(1.45,0.75) 12(1.45,1.25)
  rect 1.4x2.6 smd: 13(0,0)
  silkscreen extent -2.02,1.78 -1.78,2.02, body extent -1.5,-1.5 1.5,1.5, height 0.77
SOTFL50P160X60-5N#1 [mm]
  rrect25% 0.66x0.3 smd: 1(-0.735,0.5) 3(-0.735,-0.5) 4(0.735,-0.5) 5(0.735,0.5)
  silkscreen extent -1.8,-0.97 0.6,0.97, body extent -0.77,-0.8 0.83,0.8, height 0.6
SOTFL50P160X60-5N#2 [mm]
  rrect25% 0.66x0.3 smd: 1(-0.735,0.5) 3(-0.735,-0.5) 5(0.735,0.5) S(0.735,-0.5)
  silkscreen extent -1.8,-0.97 0.6,0.97, body extent -0.77,-0.8 0.83,0.8, height 0.6
SOTFL50P160X60-5N#3 [mm]
  rrect25% 0.67x0.3 smd mask+0.05: 1(-0.735,0.5) 3(-0.735,-0.5) 4(0.735,-0.5) 5(0.735,0.5)
  silkscreen extent -1.8,-0.97 0.6,0.97, body extent -0.77,-0.8 0.83,0.8, height 0.6
SSAJ120100 [mm]
  rect 0.6x0.51 smd: 1(-1,1.285) 2(1,1.285) 3(0,1.285)
  rect 0.9x0.7 smd: 4(-3,-0.07) 5(3,-0.07)
  silkscreen extent -2.75,-2.55 2.75,2.1, body extent -3.25,-2.49 3.25,1.48, height 0.74
SUMI-CDRH127_V [mm] "SMD, 2-Leads, Body 12x12mm"
  rect 5.4x2.9 smd: 1(0,4.95) 2(0,-4.95)
  silkscreen extent -6,-6 6,6, body extent -6,-6.1 6,6.1, height 8.4
XT60PWF [mm]
  rect 4.05x4.05 hole 2.7: 1(0,0)
  round 4.05 hole 2.7: 2(7.2,0)
  round 2.7 hole 1.8: 3(-3.15,6) 4(10.35,6)
  silkscreen extent -4.15,-2.65 11.35,15.35, body extent -4.15,-1.94 11.35,15.26, height 8.37

## Part data
BAR: "P-Sensor SPI I2C 1, 25 Bar SMD", Package=None, Availability=Unavailable, MP=BMP388, Price=None
BATC: "Connector", Manufacturer_Name=Amass, Datasheet Link=https://www.tme.eu/Document/1191bc2fa3aee3c446e5a895fd8f7983/XT60PW-F.pdf, Height=8.4mm, Manufacturer_Part_Number=XT60PW-F
BMIC1 BMIC2 BMMC1 BMMC2 BMPC1 BMPC2 BOOTC1 CANC1 CANC3 HSEC1 ICMC1 ICMC4 NRST_C1 POWC1 POWC2 POWC3 SDC1 STC5 STC6 STC7 STC8 STC9 STC10 STC11 STC12 STC13 USBC1 USBC2 USBC4 V5C3: library part CMP-2100-03641-2, "CAP CER 0.1UF 16V X7R 0402", Capacitance=0.10μF, Manufacturer=Murata, Manufacturer Part Number=GRM155R71C104KA88D, Package=GRM15, Temperature="-55°C to +125°C", Temperature Characteristic=X7R, Temperature Range High=+125°C, Temperature Range Low=-55°C, Tolerance=10%, Voltage Rating=16Vdc, Category=Cap, ComponentLink2Description=Datasheet, ComponentLink2URL=https://search.murata.co.jp/Ceramy/image/img/A01X/G101/ENG/GRM155R71H471KA01-01A.pdf, Device Class L1="Passive Components", Device Class L2=Capacitors, Device Class L3="Ceramic Capacitors", Digikey Description="CAP CER 0.1UF 16V X7R 0402", Height=0.55mm, Ipc Land Pattern Name=CAPC10050X219, Lead Free=yes, Material=Ceramic, Mouser Description="0402 0.1 uF 16V ±10 % Tolerance X7R SMT Multilayer Ceramic Capacitor", Octopart=https://octopart.com/grm155r71c104ka88d-murata-196880, RoHS=TRUE, Standoff Height=0mm
BMIU1 BMIU2 BMIU3 DEU1 DEU2 GPS1U1 GPS2U1 I2CEU1 I2CU1 ICMU1 ICMU2 RCINU1 SDU1 SDU2 SDU3 SPIEU1 SPIEU2 SPIEU3 TELEM1U1 TELEM2U1 USBU1: "<a href=\"https://snapeda.com/parts/TPD2E2U06DRLR/Texas%20Instruments/view-part/?ref=eda\">Check prices</a>", Package=None, Availability=Unavailable, MP=TPD2E2U06DRLR, Price=None
BOOT NRST: "Switch", Manufacturer_Name="ALPS Electric", Mouser Part Number=688-SSAJ120100, Datasheet Link=https://tech.alpsalpine.com/e/products/detail/SSAJ120100/#ancFig2, Height=0.9mm, Manufacturer_Part_Number=SSAJ120100, Mouser Price/Stock=https://www.mouser.co.uk/ProductDetail/Alps-Alpine/SSAJ120100?qs=35GPJvxY%252Bl5mRNwFoBrl2g%3D%3D
BOOTR1 NRSTR SDR1 SDR2 SDR3 SDR4 SDR5 USBR4: library part 0603WAF1002T5E, "Resistor", Manufacturer_Name=ROYALOHM, Mouser Part Number=303-0603WAF1002T5E, Datasheet Link=https://th.mouser.com/datasheet/2/1365/1-3044649.pdf, Height=0.55mm, Manufacturer_Part_Number=0603WAF1002T5E, Mouser Price/Stock=https://www.mouser.co.uk/ProductDetail/Royalohm/0603WAF1002T5E?qs=e8oIoAS2J1TC2D0IjbSyGA%3D%3D
CAN I2C: library part CMP-17439-000411-1, "CONN HEADER SMD R/A 4POS 1.25MM", Current Rating=1A, Housing Color=Natural, Voltage Rating=50V, Contact Material=Bronze, Contact Plating=Tin, Housing Material=Nylon, Lead Free="Lead Free", Mount="Surface Mount", Number of Contacts=4, Number of Positions=4, Number of Rows=1, Orientation="Right Angle", Packaging="Cut Tape", Pitch=1.25mm, REACH SVHC="No SVHC", Series=GH, Termination=Solder
CANC2 CANC4 ICMC2 USBC3 VCAP1 VCAP2: library part CMP-13271-001039-1, "Cap Ceramic 2.2uF 6.3V X5R ±20% SMD 0402 +85°C Paper T/R", Case Code (Imperial)=0402, Case Code (Metric)=1005, Dielectric=X5R, Max Operating Temperature=85°C, Min Operating Temperature=-55°C, Package Quantity=10000, Tolerance=20%, Voltage Rating=6.3V, Capacitance=2.2uF, Case/Package=0402, Depth=0.5mm, Height=0.5mm, Lead Free="Lead Free", Length=1mm, Mount="Surface Mount", Packaging="Tape and Reel", Radiation Hardening=No, Thickness=0.022inch, Width=0.02inch
CANR1: library part 0603WAF1200T5E, "Resistor", Manufacturer_Name=ROYALOHM, Mouser Part Number=303-0603WAF1200T5E, Datasheet Link=https://www.mouser.ch/datasheet/2/1365/1-3044649.pdf, Height=0.55mm, Manufacturer_Part_Number=0603WAF1200T5E, Mouser Price/Stock=https://www.mouser.co.uk/ProductDetail/Royalohm/0603WAF1200T5E?qs=e8oIoAS2J1TIzlbaXq7mcg%3D%3D
CANU1: library part CMP-10098-000001-1, "IC TRANSCEIVER HALF 1/1 8HVSON", Manufacturer=NXP, Max Junction Temp=+150°C, Max Supply Voltage=5.5V, Min Supply Voltage=2.8V, Nominal Supply Current=5-80mA, Package=SOT782-1, Temperature="-40°C to +150°C", Temperature Range Low=-40°C, Automotive=Yes, Automotive Grade="Grade 0", Category=IC, ComponentLink2Description=Datasheet, ComponentLink2URL=https://www.nxp.com/docs/en/data-sheet/TJA1051.pdf, Device Class L1="Integrated Circuits (ICs)", Device Class L2="Interface ICs", Device Class L3=unset, Digikey Description="IC TRANSCEIVER HALF 1/1 8HVSON", Footprint Url=https://www.nxp.com/docs/en/package-information/SOT782-1.pdf, Height=1mm, Interface=CAN, Ipc Land Pattern Name=DFN300X300X85-8, Lead Free=Yes, Manufacturer Part Number=TJA1051TK/3/1J, Mouser Description="TJA1051 Single 5 V 1 MBd Surface Mount High Speed CAN Transceiver - HVSON-8", Octopart=https://octopart.com/tja1051tk%2F3%2F1j-nxp+semiconductors-47257182, RoHS=TRUE, Standoff Height=0mm, Temperature Range High=+150°C
COMP: library part CMP-191063-000001-2, "SENSOR FLIPCORE/HALL SPI 12WLCSP", Case/Package=SMD/SMT, Max Operating Temperature=85°C, Max Supply Current=20mA, Min Operating Temperature=-40°C, Operating Supply Voltage=3.6V, Package Quantity=10000, Axis="X, Y, Z", Bandwidth=10Hz, Output Type=SPI, Packaging="Tape and Reel", Resolution=13b
DEBUG GPS GPS2 TELEM1 TELEM2: library part CMP-17439-000061-1, "CONN HEADER SMD R/A 6POS 1.25MM", Color=Natural, Contact Resistance=50mR, Current Rating=1A, Housing Color=Beige, Max Operating Temperature=85°C, Max Voltage Rating (AC)=50V, Min Operating Temperature=-25°C, Connector Type="Outer Shroud Contact", Contact Material=Bronze, Contact Plating=Tin, Depth=4.05mm, Fastening Type=Ramp, Housing Material=Polyamide, Lead Free="Lead Free", Length=10.75mm, Max Current Rating=1A, Mount="Surface Mount", Number of Contacts=6, Number of Positions=6, Number of Rows=1, Orientation="Right Angle", Packaging="Tape and Reel", Pitch=1.25mm, Termination=Solder, Voltage Rating=50V
Headers: "Connector", Manufacturer_Name=SAMTEC, Mouser Part Number=200-HTSW11007LT, Arrow Part Number=HTSW-110-07-L-T, Arrow Price/Stock=https://www.arrow.com/en/products/htsw-110-07-l-t/samtec?region=nac, Datasheet Link=http://suddendocs.samtec.com/catalog_english/htsw_th.pdf, Height=8.38mm, Manufacturer_Part_Number=HTSW-110-07-L-T, Mouser Price/Stock=https://www.mouser.co.uk/ProductDetail/Samtec/HTSW-110-07-L-T?qs=Cqqh%252BS766wkQxTMjUucNrQ%3D%3D
HSE: library part SIT1602AI-22-33E-26.000000D, "No Description Available", Manufacturer_Name=SiTime, Copyright="Copyright (C) 2025 Ultra Librarian. All rights reserved.", Manufacturer_Part_Number=SIT1602AI-22-33E-26.000000D, RefDes=RefDes, Type=Type
HSER1 I2CER1 I2CER2 I2CR1 I2CR2 POWR1 POWR2: library part 0603WAF2201T5E, "Resistor", Manufacturer_Name=ROYALOHM, Mouser Part Number=303-0603WAF2201T5E, Datasheet Link=https://www.mouser.com/datasheet/2/1365/1-3044649.pdf, Height=0.55mm, Manufacturer_Part_Number=0603WAF2201T5E, Mouser Price/Stock=https://www.mouser.co.uk/ProductDetail/Royalohm/0603WAF2201T5E?qs=e8oIoAS2J1Rz1NSs0bsVww%3D%3D
ICMC3: library part CMP-13271-000387-1, "Cap Ceramic 10nF 50V X7R ±10% SMD 0402 +125°C Paper T/R", Case Code (Imperial)=0402, Case Code (Metric)=1005, Dielectric=X7R, Max Operating Temperature=125°C, Min Operating Temperature=-55°C, Package Quantity=1, Tolerance=10%, Voltage=50V, Capacitance=10nF, Case/Package=0402, Contact Plating=Tin, Depth=0.5mm, Height=0.5mm, Lead Free="Lead Free", Length=1mm, Material=Ceramic, Mount="Surface Mount", Packaging="Tape and Reel", Radiation Hardening=No, Thickness=0.022inch, Voltage Rating=50V, Voltage Rating (DC)=50V, Width=0.02inch
IM1: library part CMP-2000-07589-1, "High Performance 6-Axis MEMS MotionTracking(TM) Device, 1.71 to 3.45 V, -40 to 85 degC, 16-Pin LGA, RoHS", Manufacturer=InvenSense, Max Operating Temperature=85degC, Min Operating Temperature=-40degC, Package Description="16-Pin Land Grid Array, Body 3 x 3 mm, Pitch 0.5 mm", Package Reference=I62-16, Datasheet URL=http://www.invensense.com/wp-content/uploads/2016/10/DS-000176-ICM-20602-v1.0.pdf, Datasheet Version="Rev. 1.0, 10/2016", Manufacturer URL=http://www.invensense.com/, Mounting Technology=SurfaceMount, Output Type=I2C, RoHSCompliant=True, Sensor Type=Temperature
IM2: "High-performance 6-axis inertial sensor (accelerometer + gyroscope) <a href=\"https://pricing.snapeda.com/parts/BMI088/Bosch%20Sensortec/view-part?ref=eda\">Check prices</a>", Package=None, Availability=Unavailable, MP=BMI088, Price=None
J1Sens: library part CMP-2000-05666-1, "Male Header, Pitch 2.54 mm, 1 x 2 Position, Height 8.38 mm, Tail Length 2.41 mm, RoHS, Bulk", Current Rating=3A, Flammability Rating=UL94V-0, Insulation Resistance=5000MOhms, Manufacturer=FCI, Operating Temperature Range=-65Cto+125C, Package Description="Male Header, Pitch 2.54 mm, 1 x 2 Position, Height 8.38 mm, Tail Length 2.41 mm", Voltage Rating=1.5kV, Brand=FCI, Contact Gender=Pin(Male), Contact Material=PhosphorBronze, Contact Plating=Gold/GTX, Datasheet URL=https://datasheet.ciiva.com/5149/68000-274228-5149165.pdf, Datasheet Version="Rev. F, 04/2006", Factory Pack Quantity=100, Housing Material=Thermoplastic, Manufacturer URL=http://www.amphenol.com/, Mating Post Length=5.84mm, Mounting Angle=Vertical, Mounting Style=ThroughHole, Mounting Technology=ThroughHole, Number of Positions=2, Number of Positions / Contacts=2, Number of Rows=1, Package Reference=68000-102HLF, Packaging=Bulk, Pitch=2.54mm, Product Category=Headers&WireHousings, Product Type=Headers, RoHS=Details, Series=68000, Termination Post Length=2.41mm, Termination Style=ThroughHole, Type=Unshrouded
LSE: library part CMP-25159-264721-1, "MEMS OSC TCXO 32.7680KHZ LVCMOS", Case/Package=SMD/SMT, Frequency=32.768kHz, Frequency Stability=5ppm, Max Operating Temperature=85°C, Max Supply Current=1.52uA, Min Operating Temperature=-40°C, Ratings=AEC-Q100, Mount="Surface Mount", Packaging="Tape and Reel", Series=SiT1552
POWC4 SDC2 STC1 STC2: library part CMP-13271-001051-1, "Cap Ceramic 1uF 25V X5R ±10% SMD 0402 +85°C Paper T/R", Case Code (Imperial)=0402, Case Code (Metric)=1005, Dielectric=X5R, Max Operating Temperature=85°C, Min Operating Temperature=-55°C, Package Quantity=10000, Tolerance=10%, Voltage Rating=25V, Capacitance=1uF, Case/Package=0402, Depth=0.5mm, Height=0.5mm, Lead Free="Lead Free", Length=1mm, Material=Ceramic, Mount="Surface Mount", Packaging="Tape and Reel", Radiation Hardening=No, Thickness=0.022inch, Width=0.02inch
POWER: "Connector", Manufacturer_Name=Molex, Mouser Part Number=538-502494-0670, Datasheet Link=https://www.molex.com/content/dam/molex/molex-dot-com/products/automated/en-us/salesdrawingpdf/502/502494/5024940670_sd.pdf, Height=7.1mm, Manufacturer_Part_Number=502494-0670, Mouser Price/Stock=https://www.mouser.co.uk/ProductDetail/Molex/502494-0670?qs=zRnNmUVysJflJNy8qKc1Eg%3D%3D
SD: "Surface Mount Micro SD Card Connector, with Push In Termination", Package=None, Check_prices=https://www.snapeda.com/parts/104031-0811/Molex/view-part/?ref=eda, MF=Molex, MP=104031-0811, SnapEDA_Link=https://www.snapeda.com/parts/104031-0811/Molex/view-part/?ref=snap
SPI: library part CMP-17439-000109-1, "CONN HEADER SMD R/A 7POS 1.25MM", Color=Natural, Current Rating=1A, Flammability Rating="UL94 V-0", Max Operating Temperature=85°C, Min Operating Temperature=-25°C, Package Quantity=2500, Voltage Rating=50V, Connector Type=Header, Contact Finish - Mating=TIN, Contact Material=Bronze, Contact Plating=Tin, Contact Shape=Rectangular, Contact Type="Outer Shroud Contact", Fastening Type=Ramp, Housing Color=Natural, Housing Material=Nylon, Insulation Color=Natural, Insulation Material=Nylon, Lead Free="Lead Free", Mount="Surface Mount", Number of Contacts=7, Number of Positions=7, Number of Rows=1, Packaging="Cut Tape", Pitch=0.049inch, Series=GH, Termination=Solder, Voltage Rating (AC)=50V, Wire/Cable Gauge=26AWG
ST: library part CMP-12105-000050-1, "IC MCU 32BIT 2MB FLASH 100LQFP", Ambient Temperature Range High=+85°C, Ambient Temperature Range Low=-40°C, Frequency=480MHz, Manufacturer=STMicroelectronics, Max Junction Temp=+125°C, Max Supply Voltage=3.6V, Min Supply Voltage=1.71V, Package=LQFP100-1L, Temperature="-40°C to +125°C", Automotive=No, Category=IC, ComponentLink2Description=Datasheet, ComponentLink2URL=https://www.st.com/resource/en/datasheet/stm32h743vi.pdf, Core Architecture="Arm Cortex-M7", Data Bus Width=32bits, Device Class L1="Integrated Circuits (ICs)", Device Class L2="Embedded Processors and Controllers", Device Class L3=Microcontrollers, Digikey Description="IC MCU 32BIT 2MB FLASH 100LQFP", Height=1.6mm, Interface=I2C,SPI,UART,USART,USB,LIN,IrDA,Ethernet,I2S,Other, Ipc Land Pattern Name=QFP50P1600X1600X160-100, Lead Free=Yes, Manufacturer Part Number=STM32H743VIT6, Memory Size=2MBytes, Memory Type=FLASH, Number Of A/D Converters=3, Number Of Adc Channels=36, Number Of Cores=1, Number Of Ethernet Channels=1, Number Of I2C Channels=4, Number Of I/Os=82, Number Of Pwm Channels=42, Number Of Spi Channels=6, Number Of Timers/Counters=20, Number Of Uart Channels=9, Number Of Usb Channels=2, Octopart=https://octopart.com/stm32h743vit6-stmicroelectronics-76372527, Ram Size=1060KBytes, RoHS=TRUE, Standoff Height=0.05mm, Temperature Range High=+125°C, Temperature Range Low=-40°C
STC3 STC4: library part CMP-13271-000548-1, "Cap Ceramic 4.7uF 10V X5R ±20% SMD 0402 +85°C Paper T/R", Case Code (Imperial)=0402, Case Code (Metric)=1005, Dielectric=X5R, Max Operating Temperature=85°C, Min Operating Temperature=-55°C, Package Quantity=10000, Tolerance=20%, Voltage Rating=10V, Capacitance=4.7uF, Case/Package=0402, Lead Free="Lead Free", Length=0.039inch, Mount="Surface Mount", Packaging="Tape and Reel", Thickness=0.022inch, Width=0.02inch
USB: "USB Connectors 24 Receptacle 1 8.94*7.3mm RoHS", Package=Package, Check_prices=https://www.snapeda.com/parts/TYPE-C-31-M-12/HRO+Electronics+Co.%252C+Ltd./view-part/?ref=eda, MF="HRO Electronics Co., Ltd.", MP=TYPE-C-31-M-12, SnapEDA_Link=https://www.snapeda.com/parts/TYPE-C-31-M-12/HRO+Electronics+Co.%252C+Ltd./view-part/?ref=snap
USBD1 V5D2: library part CMP-08607-000042-1, "TVS DIODE 5V 9.2V DO214AA", Breakdown Voltage=6.4V, Clamping Voltage=9.2V, Manufacturer="Littelfuse Inc", Max Junction Temp=+150°C, Package=SMBJ, Peak Pulse Current=65.3A, Peak Pulse Power=600W, Reverse Standoff Voltage=5V, Temperature="-65°C to +150°C", Temperature Range Low=-65°C, Automotive=No, Category=Diode, ComponentLink2Description=Datasheet, ComponentLink2URL=https://www.littelfuse.com/~/media/electronics/datasheets/tvs_diodes/littelfuse_tvs_diode_smbj_datasheet.pdf.pdf, Device Class L1="Circuit Protection", Device Class L2="TVS Diodes", Device Class L3=unset, Digikey Description="TVS DIODE 5V 9.2V DO214AA", Direction=Unidirectional, Height=2.61mm, Lead Free=Yes, Manufacturer Part Number=SMBJ5.0A, Mouser Description="TVSS; Diode; For Data/Comm; Industrial Equip; 65.3A; SMD; Solder Term; Clamp-V 9.2V", Number Of Channels=1, Octopart=https://octopart.com/smbj5.0a-littelfuse-8835, RoHS=TRUE, Temperature Range High=+150°C
USBR1 USBR2 USBR3: library part 0603WAF5101T5E, "Resistor", Manufacturer_Name="UNI-ROYAL(Uniroyal Elec)", Datasheet Link=https://datasheet.lcsc.com/szlcsc/Uniroyal-Elec-0603WAF5101T5E_C23186.pdf, Height=0.55mm, Manufacturer_Part_Number=0603WAF5101T5E
V5C1in: library part CMP-1037-04923-3, "Chip Multilayer Ceramic Capacitors for General Purpose, 1206, 4.7uF, X7R, 15%, 10%, 50V", Capacitance=4.7uF, Case Code (Imperial)=1206, Case Code (Metric)=3216, Dielectric=X7R, Max Operating Temperature=125°C, Min Operating Temperature=-55°C, Package Quantity=2000, Tolerance=10%, Voltage=50V, Case/Package=1206, Depth=1.6mm, Height=1.6mm, Lead Free="Lead Free", Length=3.2mm, Material=Ceramic, Mount="Surface Mount", Packaging="Tape and Reel", Radiation Hardening=No, REACH SVHC="No SVHC", Termination=SMD/SMT, Thickness=0.071inch, Voltage Rating=50V, Voltage Rating (DC)=50V, Width=0.063inch
V5C2in V5DivC: library part CMP-2008-04639-2, "Chip Multilayer Ceramic Capacitors for General Purpose, 0402, 0.10uF, X7R, 15%, 10%, 50V", Capacitance=100nF, Case Code (Imperial)=0402, Case Code (Metric)=1005, Dielectric=X7R, Dielectric Material=Ceramic, Max Operating Temperature=125°C, Min Operating Temperature=-55°C, Package Quantity=10000, Tolerance=10%, Voltage=50V, Case/Package=0402, Depth=0.5mm, Dissipation Factor=0.025%, Height=0.5mm, Lead Free="Lead Free", Length=1mm, Material=Ceramic, Mount="Surface Mount", Packaging="Tape and Reel", REACH SVHC="No SVHC", Resistor Type=Ceramic, Termination=SMD/SMT, Thickness=0.022inch, Voltage Rating=50V, Voltage Rating (DC)=50V, Weight=0.000212oz, Width=0.5mm
V5C4 V5C5 V5C6: library part CMP-2000-06362-2, "CAP CER 47UF 16V X5R 1210", Capacitance=47uF, Case Code (Imperial)=1210, Case Code (Metric)=3225, Dielectric=X5R, Max Operating Temperature=85°C, Min Operating Temperature=-55°C, Package Quantity=1, Tolerance=10%, Voltage=16V, Case/Package=1210, Depth=2.5mm, Height=2.5mm, Lead Free="Lead Free", Length=3.2mm, Material=Ceramic, Mount="Surface Mount", Number of Pins=2, Packaging="Cut Tape", Radiation Hardening=No, REACH SVHC="No SVHC", RoHS Compliant=Yes, Termination=SMD/SMT, Thickness=0.106inch, Voltage Rating=16V, Voltage Rating (DC)=16V, Width=0.098inch
V5Con: library part CMP-1024-00336-5, "Male Header, Pitch 2.54 mm, 2 x 3 Position, Height 8.38 mm, Tail Length 5.08 mm, -55 to 125 degC, RoHS, Bulk", Manufacturer=Samtec, Max Operating Temperature="125 degC", Min Operating Temperature="-55 degC", ComponentLink1Description="Manufacturer URL", ComponentLink1URL=http://www.samtec.com/, ComponentLink2Description=Datasheet, ComponentLink2URL=https://datasheet.ciiva.com/25618/0900766b81154476-25618436.pdf, ComponentLink3Description="Package Specification", ComponentLink3URL=http://suddendocs.samtec.com/prints/tsw-xxx-xx-x-x-xx-xxx-footprint.pdf, DatasheetVersion=04/2012, Lead Pitch="2.54 mm", Mount="Through Hole", Mounting Technology="Through Hole", PackageDescription="Male Header, Pitch 2.54 mm, 2 x 3 Position, Height 8.38 mm, Tail Length 5.08 mm", PackageReference=TSW-103-08-L-D, RoHSCompliant=true
V5D1: library part CMP-08607-000022-1, "TVS DIODE 36V 58.1V DO214AA", Breakdown Voltage=40V, Clamping Voltage=58.1V, Manufacturer="Littelfuse Inc", Max Junction Temp=+150°C, Package=SMBJ, Peak Pulse Current=10.4A, Peak Pulse Power=600W, Reverse Standoff Voltage=36V, Temperature="-65°C to +150°C", Temperature Range Low=-65°C, Automotive=No, Category=Diode, ComponentLink2Description=Datasheet, ComponentLink2URL=https://www.littelfuse.com/~/media/electronics/datasheets/tvs_diodes/littelfuse_tvs_diode_smbj_datasheet.pdf.pdf, Device Class L1="Circuit Protection", Device Class L2="TVS Diodes", Device Class L3=unset, Digikey Description="TVS DIODE 36V 58.1V DO214AA", Direction=Unidirectional, Height=2.61mm, Lead Free=Yes, Manufacturer Part Number=SMBJ36A, Mouser Description="TVS Diodes - Transient Voltage Suppressors 36Vr 600W 10.4A 5% UniDirectional", Number Of Channels=1, Octopart=https://octopart.com/smbj36a-littelfuse-37790, RoHS=TRUE, Temperature Range High=+150°C
V5Div1: library part RC0603FR-07360KL, "Resistor", Manufacturer_Name=KEMET, Mouser Part Number=603-RC0603FR-07360KL, Datasheet Link=http://www.yageo.com/documents/recent/PYu-RC0603_51_RoHS_L_v5.pdf, Height=0.55mm, Manufacturer_Part_Number=RC0603FR-07360KL, Mouser Price/Stock=https://www.mouser.co.uk/ProductDetail/Yageo/RC0603FR-07360KL/?qs=diQw95jMAePBWfaBve%2FwbQ%3D%3D
V5Div2 V5R2: library part CMP-2002-08508-1, Manufacturer="Vishay Dale", Part Number=CRCW040230K9FKED
V5F1: "Fuse", Arrow Part Number=3425L300/36MR, Manufacturer_Name=LITTELFUSE, Mouser Part Number=576-3425L300/36MR, Arrow Price/Stock=https://www.arrow.com/en/products/3425l30036mr/littelfuse?region=nac, Datasheet Link=https://www.arrow.com/en/products/3425l30036mr/littelfuse?region=nac, Height=1.4mm, Manufacturer_Part_Number=3425L300/36MR, Mouser Price/Stock=https://www.mouser.co.uk/ProductDetail/Littelfuse/3425L300-36MR?qs=amGC7iS6iy%252BViy95vVWOuA%3D%3D
V5IC1: "Integrated Circuit", Manufacturer_Name="Texas Instruments", Mouser Part Number=595-LMR51450FNDRRR, Arrow Part Number=LMR51450FNDRRR, Arrow Price/Stock=https://www.arrow.com/en/products/lmr51450fndrrr/texas-instruments?utm_currency=USD&region=nac, Datasheet Link=https://www.ti.com/lit/ds/symlink/lmr51450.pdf?ts=1681907573404&ref_url=https%253A%252F%252Fwww.ti.com%252Fproduct%252FLMR51450%252Fpart-details%252FLMR51450FNDRRR, Height=0.8mm, Manufacturer_Part_Number=LMR51450FNDRRR, Mouser Price/Stock=https://www.mouser.co.uk/ProductDetail/Texas-Instruments/LMR51450FNDRRR?qs=rQFj71Wb1eVWWBj0Ni4OAA%3D%3D
V5L1: library part CMP-2000-06084-1, "Power Inductor, 10 uH, +/- 20%, -40 to 100 degC, 2-Pin SMD, RoHS, Tape and Reel", Current - Saturation=-, Current Rating=5.4A, DC Resistance (DCR)=21.6mOhmMax, Frequency - Test=1kHz, Inductance=10µH, Manufacturer=Sumida, Operating Temperature=-40°C~100°C, Package / Case=Nonstandard, Package Description="2-Pin Surface Mount Device, Body 12 x 12 mm", Package Reference=CDRH127, Standard Package=1, Tolerance=±20%, Catalog Drawings=CDRH127SeriesFrontCDRH127SeriesSideCDRH127SeriesBottom, Category=Inductors,Coils,Chokes, Datasheet URL=http://products.sumida.com/products/pdf/CDRH127.pdf, Datasheet Version=01/2014, Family=FixedInductors, Frequency - Self Resonant=-, Height - Seated (Max)="0.315\"(8.00mm)", Manufacturer URL=http://www.sumida.com/, Material - Core=-, Mounting Technology=SurfaceMount, Mounting Type=SurfaceMount, Online Catalog=CDRHSeries, Other Names=308-1457-1, Packaging=CutTape(CT), Product Training Modules=PowerInductorBasics, Q @ Freq=-, Ratings=-, Series=CDRH127, Shielding=Shielded, Size / Dimension="0.472\"Lx0.472\"W(12.00mmx12.00mm)", Type=-
V5Q1: library part CMP-02550-000038-1, "MOSFET P-CH 100V 28A PPAK SO-8", Continuous Drain Current=-7.8A, Drain To Source Breakdown Voltage=-100V, Drain To Source Resistance=0.033Ω, Gate To Source Voltage=20V, Input Capacitace At Vds="4600pF @ -50V", Manufacturer=Vishay, Max Forward Diode Voltage=-1.2V, Max Junction Temp=+150°C, Package=S17-0173-SINGLE, Power Dissipation=5.2W, Pulse Drain Current=-40A, Temperature="-55°C to +150°C", Temperature Range Low=-55°C, Typ Forward Diode Voltage=-0.8V, Automotive=No, Category=Trans, ComponentLink2Description=Datasheet, ComponentLink2URL=http://www.vishay.com/docs/73436/si7489dp.pdf, Depletion Mode=False, Device Class L1="Discrete Semiconductors", Device Class L2=Transistors, Device Class L3=MOSFETs, Digikey Description="MOSFET P-CH 100V 28A PPAK SO-8", Drain To Source Voltage=-100V, Gate Charge At Vgs="106nC @ -10V", Height=1.17mm, Lead Free=Yes, Manufacturer Part Number=SI7489DP-T1-E3, Mouser Description="MOSFET 100V 28A 83W", Number Of Channels=1, Number Of P Channels=1, Octopart=https://octopart.com/si7489dp-t1-e3-vishay-42302267, Reverse Recovery Charge=150nC, Reverse Recovery Time=60ns, RoHS=TRUE, Rthja Max=24°C/W, Standoff Height=0mm, Temperature Range High=+150°C, Threshold Vgs Max=-3V, Threshold Vgs Min=-1V, Transconductance=38S, Turn Off Delay Time=110ns, Turn On Delay Time=15ns
V5R0 V31R0 V32R0: "Resistor", Manufacturer_Name=YAGEO, Datasheet Link=https://www.yageo.com/upload/media/product/productsearch/datasheet/rchip/PYu-AC_51_RoHS_L_11.pdf, Height=0.65mm, Manufacturer_Part_Number=AC2512JK-070RL